# Altium PCB Driver_BLDC.PcbDoc
Units mm, origin at the board's own origin, x right, y up, seen from the top; angles counter-clockwise.
Board outline 100 x 100 mm, 2 copper layers (Top Layer, Bottom Layer), stack 1.569 mm thick; 50 components, 35 nets, 151 pads, 170 vias.
Unrouted connection lines stored in the file: 94.
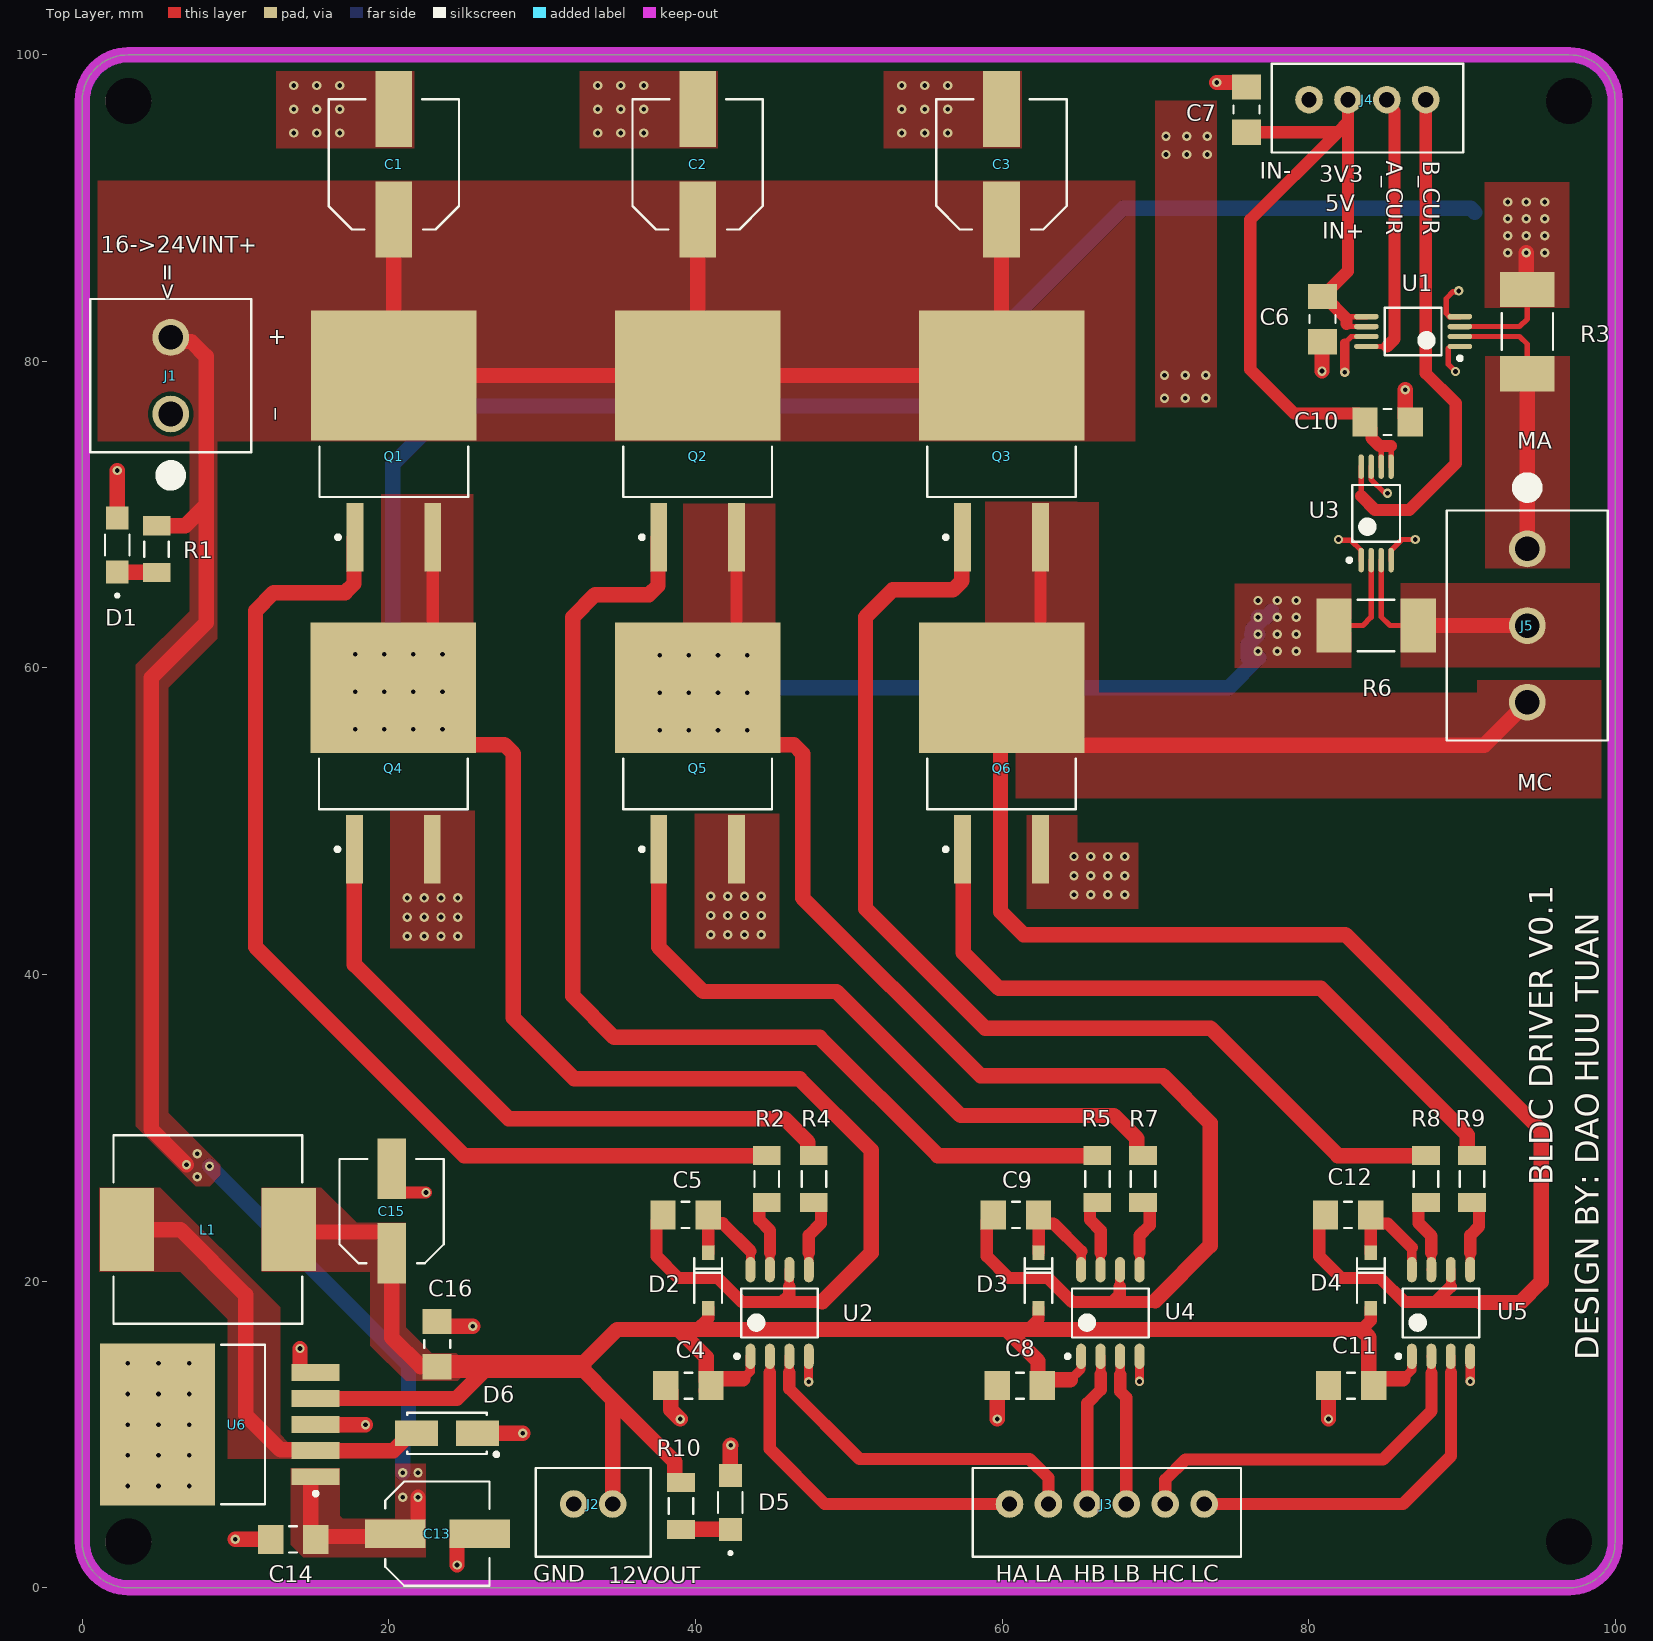
[diagram p0: Top Layer view]
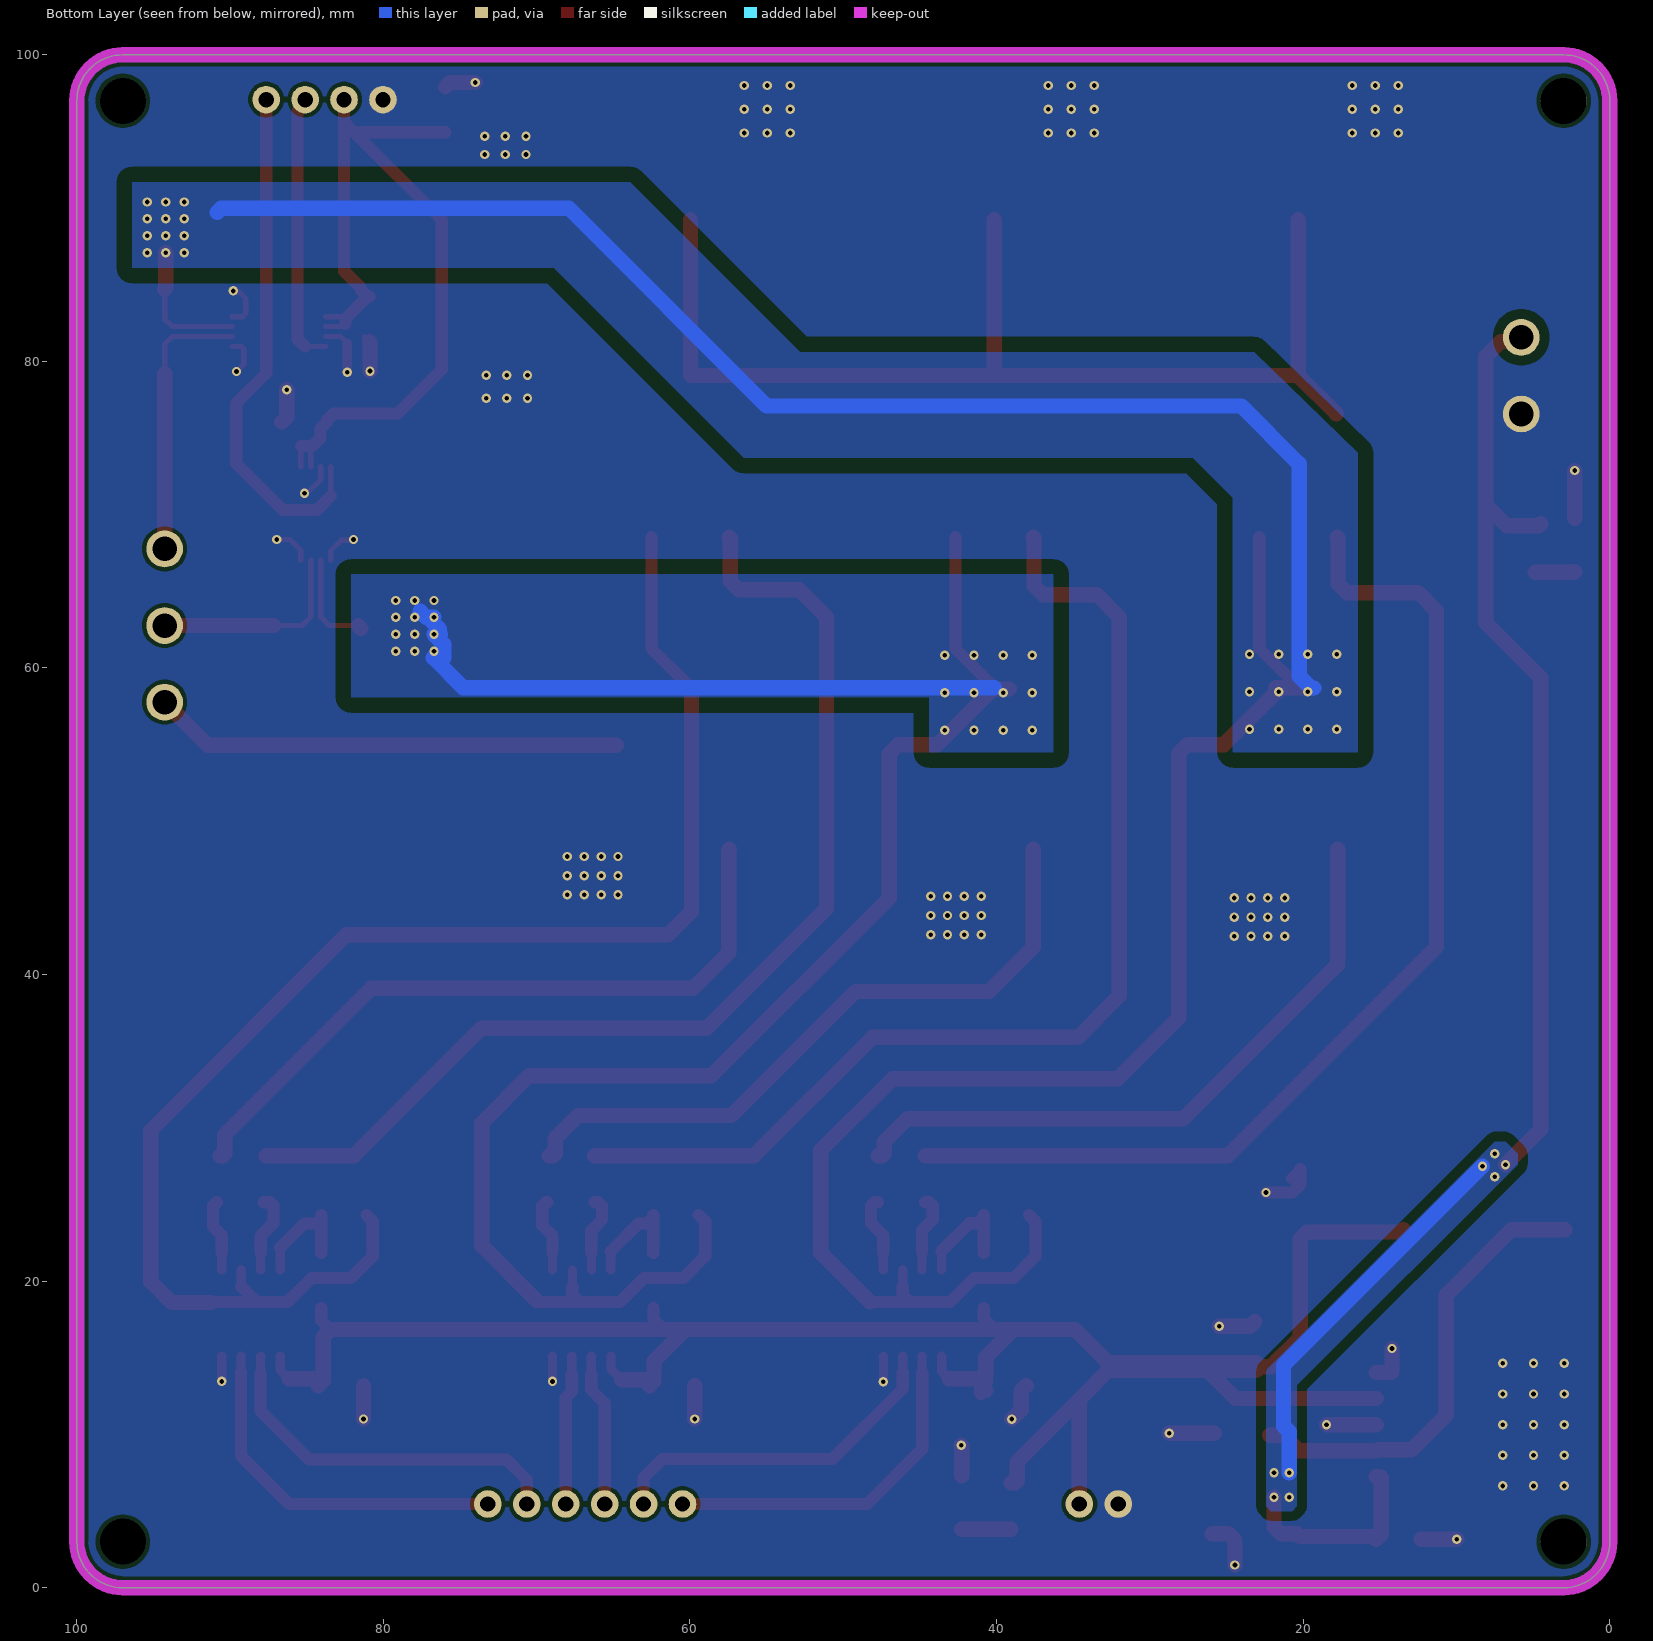
[diagram p1: Bottom Layer view, seen from below]
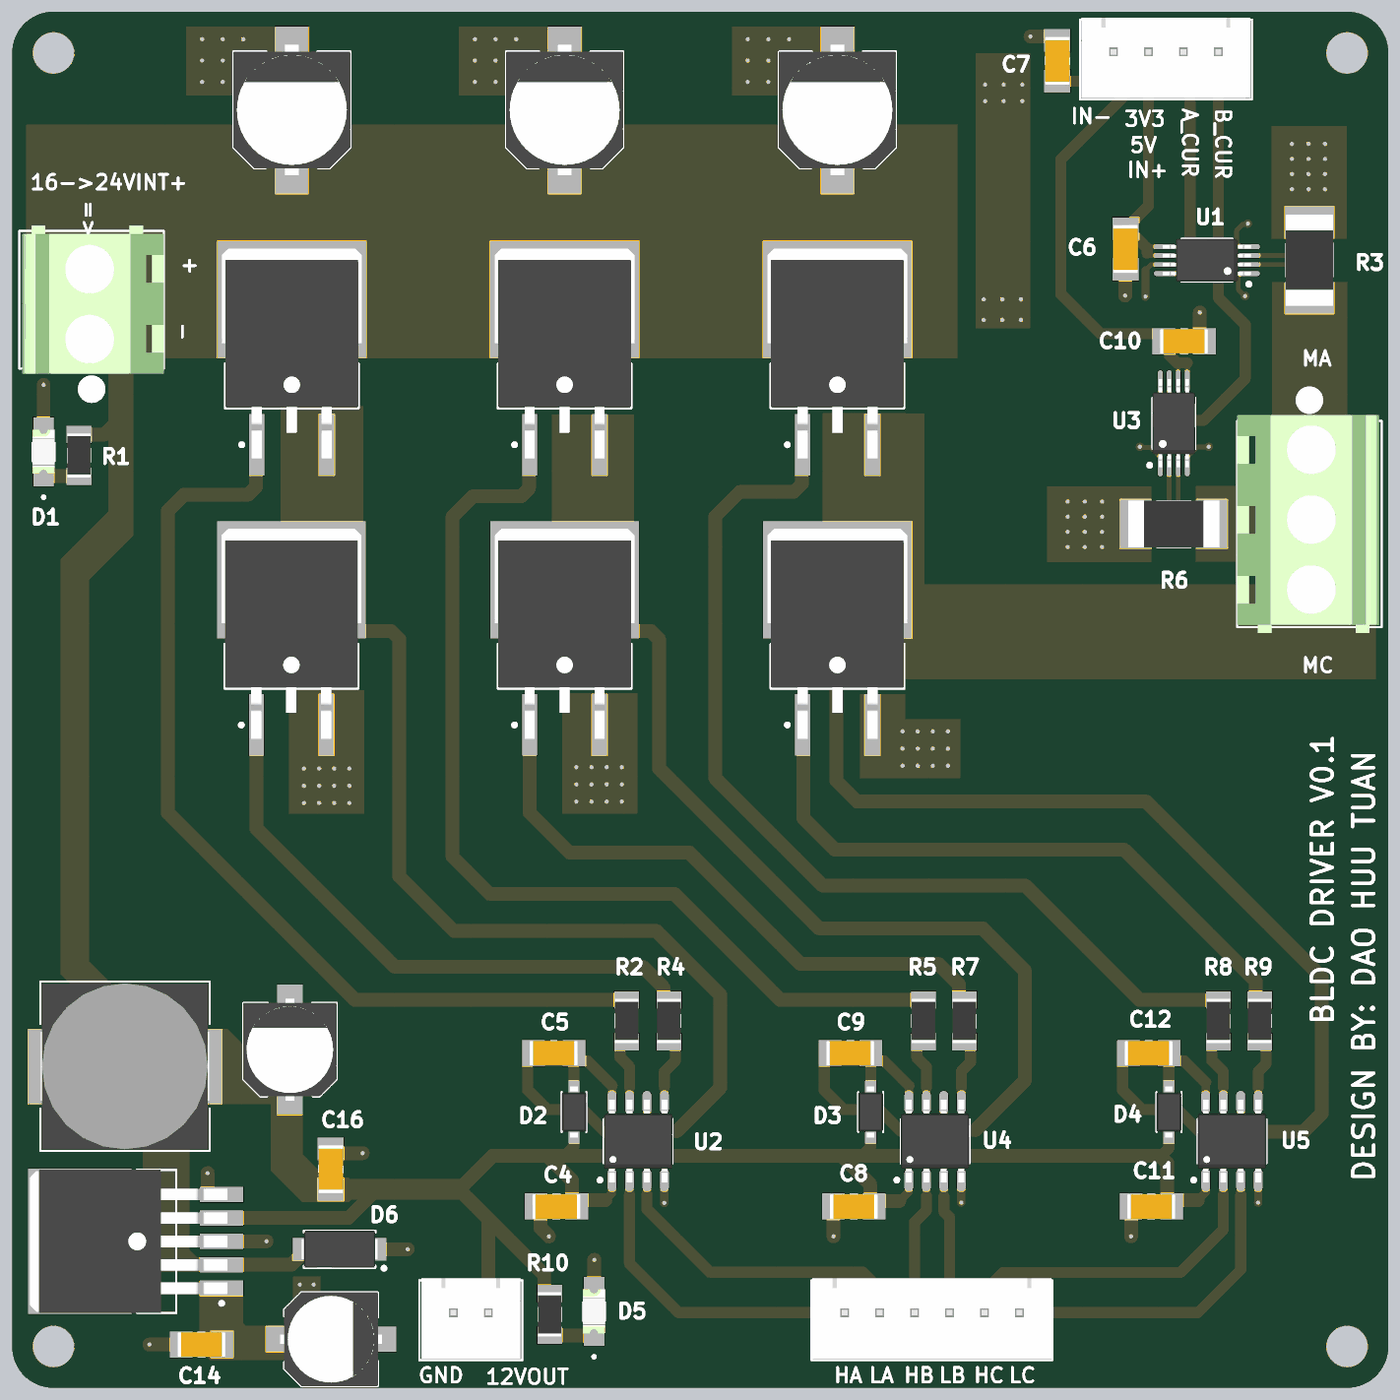
[diagram p2: 3D render of the assembled board from above, using the file's embedded part models]

## Layer stack, top to bottom
Top Solder: solder mask 0.0254, SM-001, Dk 4
Top Layer: signal copper 0.035
Dielectric 1: core 1.4986, Core-043, Dk 4.3
Bottom Layer: signal copper 0.035
Bottom Solder: solder mask 0.0254, SM-001, Dk 4

## Board outline
3,0 cw(c3,3) 0,3 0,97 cw(c3,97) 3,100 97,100 cw(c97,97) 100,97 100,3 cw(c97,3) 97,0

## Design rules (kind name [scope] priority, off if disabled: settings)
Clearance Clearance_3 [OnLayer('Bottom Layer') vs InNet('P_SUPPLY')] p1: gap=0.635 ignorepadtopadclearanceinfootprint=FALSE
Clearance Clearance_2 [OnLayer('Bottom Layer') vs InNet('MB_SENS')] p2: gap=1 ignorepadtopadclearanceinfootprint=FALSE
Clearance Clearance_1 [OnLayer('Bottom Layer') vs InNet('MA_SENS')] p3: gap=1 ignorepadtopadclearanceinfootprint=FALSE
Clearance [All] p4: gap=0.254 ignorepadtopadclearanceinfootprint=FALSE
HoleSize [All] p1: absolutevalues=TRUE maxlimit=3 minlimit=0.025 maxpercent=80.000 minpercent=20.000
MinimumSolderMaskSliver MinimumSolderMaskSliver_SSOT [HasFootprint('TSOP65P640X120-8M')] p1: minsoldermaskwidth=0.178
MinimumSolderMaskSliver [All] p2: minsoldermaskwidth=0.254
PlaneConnect [All] p1: planeconnectstyle=Direct reliefexpansion=0.508 reliefentries=4 reliefconductorwidth=0.254 reliefairgap=0.254
PolygonConnect [All] p1: connectstyle=Direct reliefconductorwidth=0.254 reliefentries=4 polygonreliefangle="90 Angle" airgapwidth=0.254
RoutingVias [All] p1: holewidth=0.305 width=0.61 viastyle="Through Hole" minholewidth=0.305 minwidth=0.61 maxholewidth=0.305 maxwidth=0.61
SolderMaskExpansion SolderMaskExpansion_via [IsVia] p1: expansion=0.102 istentingtop=TRUE
SolderMaskExpansion [All] p2: expansion=0.051 istentingtop=FALSE
SupplyNets "Schematic Supply Nets_3" [InNet('P_SUPPLY')] p1: voltage=0.000
SupplyNets "Schematic Supply Nets_2" [InNet('V_SENS+')] p2: voltage=0.000
SupplyNets "Schematic Supply Nets_1" [InNet('12V+')] p3: voltage=0.000
SupplyNets "Schematic Supply Nets" [InNet('GND')] p4: voltage=0.000
Width [All] p1: maxlimit=20 minlimit=0.254 preferedwidth=0.6 minimp=50.000000 maximp=50.000000 favimp=50.000000
27 further rules are at their usual default settings.

## Components (designator, comment, footprint, x,y, rotation, side; value= is the part's Value field where it differs from the comment)
C1 "220uF" CAPAE9583X105M 20.32,92.86 r90 top locked
C2 "220uF" CAPAE9583X105M 40.145,92.86 r90 top locked
C3 "220uF" CAPAE9583X105M 59.97,92.86 r90 top locked
C4 "1uF" CAPC3216X18M 39.545,13.18 r180 top locked
C5 "1uF" CAPC3216X18M 39.355,24.32 r0 top locked
C6 "100nF" CAPC3216X18M 80.91,82.755 r90 top locked
C7 "10uF" CAPC3216X18M 75.95,96.43 r90 top locked
C8 "1uF" CAPC3216X18M 61.16,13.18 r180 top locked
C9 "1uF" CAPC3216X18M 60.905,24.32 r0 top locked
C10 "100nF" CAPC3216X18M 85.155,76.05 r180 top locked
C11 "1uF" CAPC3216X18M 82.78,13.18 r180 top locked
C12 "1uF" CAPC3216X18M 82.585,24.32 r0 top locked
C13 "100uF" CAPAE7466X77M 23.17,3.53 r0 top locked
C14 "100nF" CAPC3216X18M 13.76,3.15 r180 top locked
C15 "100uF" CAPAE7466X77M 20.18,24.57 r90 top locked
C16 "100nF" CAPC3216X18M 23.15,15.89 r90 top locked
D1 "LED" LEDC3216X120N 2.28,68.02 r90 top locked
D2 "1N4148W" SODFL370X135-2M 40.83,20.04 r90 top locked
D3 "1N4148W" SODFL370X135-2M 62.38,20.04 r90 top locked
D4 "1N4148W" SODFL370X135-2M 84.06,20.04 r90 top locked
D5 "LED" LEDC3216X120N 42.28,5.557 r90 top locked
D6 "1N5824" DIOM5025X22M 23.79,10.07 r180 top locked
J1 "KF128-5.0-2P" KF128-2P 5.77,79.07 r90 top locked
J2 "xh2.54_2p" xh2.54_2p 33.33,5.46 r180 top locked
J3 "xh2.54_6p" xh2.54_6p 66.838,5.46 r180 top locked
J4 "xh2.54_4p" xh2.54_4P 83.84,97.08 r180 top locked
J5 "KF128-3P" KF128-3P 94.27,62.77 r270 top locked
L1 "330uH" INDP120120X80M 8.19,23.36 r180 top locked
Q1 "IRF540S" DPAK254P1524X483-3M 20.32,74.83 r90 top locked
Q2 "IRF540S" DPAK254P1524X483-3M 40.145,74.83 r90 top locked
Q3 "IRF540S" DPAK254P1524X483-3M 59.97,74.83 r90 top locked
Q4 "IRF540S" DPAK254P1524X483-3M 20.29,54.47 r90 top locked
Q5 "IRF540S" DPAK254P1524X483-3M 40.145,54.47 r90 top locked
Q6 "IRF540S" DPAK254P1524X483-3M 59.97,54.47 r90 top locked
R1 "10k" RESC3116X06M 4.85,67.75 r270 top locked
R2 "100R" RESC3116X06M 44.65,26.665 r90 top locked
R3 "5mR" RESC6432X07M 94.27,81.95 r270 top locked
R4 "100R" RESC3116X06M 47.73,26.665 r90 top locked
R5 "100R" RESC3116X06M 66.22,26.665 r90 top locked
R6 "5mR" RESC6432X07M 84.41,62.77 r180 top locked
R7 "100R" RESC3116X06M 69.2,26.665 r90 top locked
R8 "100R" RESC3116X06M 87.66,26.665 r90 top locked
R9 "100R" RESC3116X06M 90.66,26.665 r90 top locked
R10 "10k" RESC3116X06M 39.06,5.332 r270 top locked
U1 "INA240A2PWR" TSOP65P640X120-8M 86.82,81.95 r180 top locked
U2 "IR2103STRPBF" SOIC127P600X175-8M 45.49,17.92 r90 top locked
U3 "INA240A2PWR" TSOP65P640X120-8M 84.41,70.09 r90 top locked
U4 "IR2103STRPBF" SOIC127P600X175-8M 67.065,17.92 r90 top locked
U5 "IR2103STRPBF" SOIC127P600X175-8M 88.64,17.92 r90 top locked
U6 "LM2596S-12" DPAK170P1435X470-6M 8.97,10.64 r180 top locked

## Footprints (in the part's own frame and the unit in brackets; to place one, negate y for a bottom-side part, rotate by r counter-clockwise, add the part's x,y. Pads: shape width x height; smd on the part's side, far side on the other; paste and mask are expansions set on the pad)
CAPAE7466X77M [mm] "Aluminum Electrolytic Capacitor, Body 6.60x6.60x7.70mm, IPC Low Density"
  rect 3.95x1.85 smd: N(2.75,0) P(-2.75,0)
  silkscreen extent -3.4,-3.4 3.4,3.4, body extent -3.7,-3.4 3.7,3.4, height 7.7
CAPAE9583X105M [mm] "Aluminum Electrolytic Capacitor, Body 8.30x8.30x10.50mm, IPC Low Density"
  rect 4.95x2.4 smd: N(3.6,0) P(-3.6,0)
  silkscreen extent -4.25,-4.25 4.25,4.25, body extent -4.75,-4.25 4.75,4.25, height 10.5
CAPC3216X18M [mm] "Chip Capacitor, 2-Leads, Body 3.20x1.60mm, IPC Low Density"
  rect 1.65x1.9 smd: 1(-1.475,0) 2(1.475,0)
  silkscreen extent -0.25,-0.85 0.25,0.85, body extent -1.75,-0.9 1.75,0.9, height 1.8
DIOM5025X22M [mm] "Molded Diode, 2-Leads, Body 4.95x2.50mm, IPC Low Density"
  rect 2.8x1.65 smd: A(-2,0) K(2,0)
  silkscreen extent -3.35,-1.35 2.6,1.5, body extent -2.82,-1.35 2.82,1.35, height 2.2
DPAK170P1435X470-6M [mm] "D2-PAK, 6-Pads, Body 7.55x8.57mm (max), IPC Low Density"
  rect 3.15x1.1 smd: 1(-6.25,3.4) 2(-6.25,1.7) 3(-6.25,0) 4(-6.25,-1.7) 5(-6.25,-3.4)
  rect 7.5x10.55 smd: 3(4.05,0)
  silkscreen extent -6.38,-5.2 -0.1,5.2, body extent -6.67,-5.2 7.68,5.2, height 4.7
DPAK254P1524X483-3M [mm] "D2-PAK, 3-Pads, Body 8.44x8.19mm (max), IPC Low Density"
  rect 8.5x10.8 smd: D(4.25,0)
  rect 4.45x1.1 smd: G(-6.3,2.54) S(-6.3,-2.54)
  silkscreen extent -6.42,-4.85 -0.4,4.85, body extent -7.3,-5.08 7.95,5.08, height 4.83
INDP120120X80M [mm] "Precision Wire Wound Inductor, 2-Leads, Body 12.05x12.05mm, IPC Low Density"
  rect 3.55x5.4 smd: 1(-5.275,0) 2(5.275,0)
  silkscreen extent -6.15,-6.15 6.15,6.15, body extent -6.12,-6.02 6.12,6.02, height 8.1
KF128-2P [mm]
  round 2.4 hole 1.6: 1(-2.5,0) 2(2.5,0)
  silkscreen extent -7,-5.25 5,5.25, body extent -5.38,-5.25 5.38,5.05, height 14.59
KF128-3P [mm]
  round 2.4 hole 1.6: 1(-5,0) 2(0,0) 3(5,0)
  silkscreen extent -9.5,-5.25 7.5,5.25, body extent -7.92,-5.25 7.92,5.05, height 14.59
LEDC3216X120N [mm]
  rect 1.5x1.5 smd: A(-1.75,0) K(1.75,0)
  silkscreen extent -3.4,-0.8 0.68,0.8, body extent -1.6,-0.8 1.6,0.8, height 1.2
RESC3116X06M [mm] "Chip Resistor, 2-Leads, Body 3.10x1.60mm, IPC Low Density"
  rect 1.25x1.8 smd: 1(-1.525,0) 2(1.525,0)
  silkscreen extent -0.5,-0.8 0.5,0.8, body extent -1.6,-0.85 1.6,0.85, height 0.65
RESC6432X07M [mm] "Chip Resistor, 2-Leads, Body 6.37x3.18mm, IPC Low Density"
  rect 2.3x3.55 smd: 1(-2.75,0) 2(2.75,0)
  silkscreen extent -1.2,-1.68 1.2,1.68, body extent -3.32,-1.72 3.32,1.72, height 0.66
SODFL370X135-2M [mm] "SODFL, 2-Leads, Body 1.60x3.70mm, IPC Low Density"
  rect 0.95x0.8 smd: A(-1.8,0) K(1.8,0)
  silkscreen extent -1.45,-0.9 1.45,0.9, body extent -1.85,-0.9 1.85,0.9, height 1.35
SOIC127P600X175-8M [mm] "SOIC, 8-Leads, Body 4.90x3.90mm, Pitch 1.27mm, IPC Low Density"
  oval 1.65x0.65 smd: 1(-2.825,1.905) 2(-2.825,0.635) 3(-2.825,-0.635) 4(-2.825,-1.905) 5(2.825,-1.905) 6(2.825,-0.635) 7(2.825,0.635) 8(2.825,1.905)
  silkscreen extent -2.95,-2.5 1.6,2.9, body extent -3,-2.5 3,2.5, height 1.75
TSOP65P640X120-8M [mm] "TSOP, 8-Leads, Body 3.00x4.40mm, Pitch 0.65mm, IPC Low Density"
  oval 1.6x0.353 smd mask+0.051: 1(-3.05,0.975) 2(-3.05,0.325) 3(-3.05,-0.325) 4(-3.05,-0.975) 5(3.05,-0.975) 6(3.05,-0.325) 7(3.05,0.325) 8(3.05,0.975)
  silkscreen extent -3.18,-1.55 1.85,1.87, body extent -3.2,-1.55 3.2,1.55, height 1.2
xh2.54_2p [mm]
  round 1.8 hole 1 mask+0.05: 1(-1.27,0) 2(1.27,0)
  silkscreen extent -3.75,-2.35 3.75,3.45, body extent -3.61,-2.49 3.61,3.35, height 7.21
xh2.54_4P [mm]
  round 1.8 hole 1 mask+0.05: 1(-3.81,0) 2(-1.27,0) 3(1.27,0) 4(3.81,0)
  silkscreen extent -6.25,-2.35 6.25,3.45, body extent -6.15,-2.49 6.15,3.35, height 7.21
xh2.54_6p [mm]
  round 1.8 hole 1 mask+0.05: 1(-6.35,0) 2(-3.81,0) 3(-1.27,0) 4(1.27,0) 5(3.81,0) 6(6.35,0)
  silkscreen extent -8.75,-2.35 8.75,3.45, body extent -8.69,-2.49 8.69,3.35, height 7.21

## Part data
C1 C2 C3: library part VT1V221M-CRF10, "220uF 35V ±20% SMD,D8xL10.5mm Aluminum Electrolytic Capacitors - SMD ROHS", LCSC Part=C305376
C4 C5 C8 C9 C11 C12: library part CC1206JKX7R9BB105, "50V 1uF X7R ±5% 1206 Multilayer Ceramic Capacitors MLCC - SMD/SMT ROHS", LCSC Part=C527273
C6 C10 C14 C16: library part CC1206JRX7R9BB104, "50V 100nF X7R ±5% 1206 Multilayer Ceramic Capacitors MLCC - SMD/SMT ROHS", LCSC Part=C541547
C7: library part CC1206KKX7R8BB106, "25V 10uF X7R ±10% 1206 Multilayer Ceramic Capacitors MLCC - SMD/SMT ROHS", LCSC Part=C70462
C13 C15: library part VT1V101M-CRE77, "100uF 35V ±20% SMD,D6.3xL7.7mm Aluminum Electrolytic Capacitors - SMD ROHS", LCSC Part=C294520
D1 D5: library part LED_1206, "SMD LED 1206", Available=no
D2 D3 D4: "75V Independent Type 1.25V@150mA 8ns 150mA SOD-123 Switching Diodes ROHS", C908248=C908248
D6: library part SS54, "40V Independent Type 550mV@5A 5A SMA(DO-214AC) Schottky Diodes ROHS", LCSC Part=C727065
J1: "1x2P 24A -40℃~+105℃ 250V Green 12~22 Straight 5mm 2.5 1 2 Plugin,P=5mm Screw Terminal Blocks ROHS", LCSC Part=C474950
J5: library part KF128-5.0-3P, "1x3P 24A -40℃~+105℃ 250V Green 12~22 Straight 5mm 2.5 1 3 Plugin,P=5mm Screw Terminal Blocks ROHS", LCSC Part=C474951
L1: library part CDRH127/LDNP-331MC, "1.2A 330uH ±20% SMD-4P,12x12mm Power Inductors ROHS", LCSC Part=C2453076
Q1 Q2 Q3 Q4 Q5 Q6: "Power Field-Effect Transistor, 28A I(D), 100V, 0.077ohm, 1-Element, N-Channel, Silicon, Metal-oxide Semiconductor FET, TO-263AB", Avalanche Energy Rating (Eas)=230mJ, Case Connection=DRAIN, Drain Current-Max (Abs) (ID)=28A, Drain-source On Resistance-Max=77mR, DS Breakdown Voltage-Min=100V, LCSC Part=C3025611, Manufacturer="Vishay Siliconix", Max Operating Temperature=175°C, Operating Mode="ENHANCEMENT MODE", Package Body Material=Plastic, Package Shape=Rectangular, Package Style="SMALL OUTLINEMeter", Power Dissipation-Max (Abs)=150W, Pulsed Drain Current-Max (IDM)=110A, Category=Transistors, ComponentLink1Description=https://datasheet.ciiva.com:443/pdfs/VipMasterIC/IC/SILX/SILXS13402/SILXS13402-1.pdf?src-supplier=IHS+Markit, ComponentLink1URL=https://datasheet.ciiva.com:443/pdfs/VipMasterIC/IC/SILX/SILXS13402/SILXS13402-1.pdf?src-supplier=IHS+Markit, ComponentLink2Description=https://datasheet.ciiva.com/13048/sihf540s-60587-13048065.pdf?src-supplier=Mouser, ComponentLink2URL=https://datasheet.ciiva.com/13048/sihf540s-60587-13048065.pdf?src-supplier=Mouser, ComponentLink3Description=https://datasheet.ciiva.com/952/sihf540s-952269.pdf?src-supplier=Digikey, ComponentLink3URL=https://datasheet.ciiva.com/952/sihf540s-952269.pdf?src-supplier=Digikey, Drain Current-Max (ID)=28A, FET Technology="METAL-OXIDE SEMICONDUCTOR", JEDEC-95 Code=TO-263AB, JESD-30 Code=R-PSSO-G2, JESD-609 Code=e0, Manufacturer Part Number=IRF540S, Moisture Sensitivity Level=1, Number of Elements=1, Pins=2, Polarity/Channel Type=N-CHANNEL, Qualification Status="Not Qualified", RoHS=No, RoHS Compliant=No, Supplier=Avnet, Supplier Part Number=IRF540S, Surface Mount=Yes, Terminal Finish=Tin, Terminal Form="Gull Wing", Terminal Position=SINGLE, Transistor Application=SWITCHING, Transistor Element Material=SILICON
R1 R10: library part RC1206FR-0710KL, "250mW Thick Film Resistors 200V ±100ppm/℃ ±1% 10kΩ 1206 Chip Resistor - Surface Mount ROHS", LCSC Part=C132649
R2 R4 R5 R7 R8 R9: library part RC1206FR-07100RL, "250mW Thick Film Resistors 200V ±100ppm/℃ ±1% 100Ω 1206 Chip Resistor - Surface Mount ROHS", LCSC Part=C137392
R3 R6: library part WSL2512L5000FEA18, "2W 0.5mΩ Patch Current Sensing Resistors ±400ppm/℃ ±1% 2512 Current Sense Resistors / Shunt Resistors ROHS", LCSC Part=C1518119
U1 U3: "-4V~80V 400kHz Single channel TSSOP-8 Current Sense Amplifiers ROHS", LCSC Part=C129949
U2 U4 U5: "Half Bridge 2 130mA 100ns 50ns 10V~20V 270mA SOIC-8 Gate Drivers ROHS", LCSC Part=C2957
U6: "Step-down type Fixed 12V 4.5V~40V 3A TO-263-5L DC-DC Converters ROHS", LCSC Part=C19631824

## Free pads (board coordinates)
  oval 3x1.6 hole 3: 5(3,97) 6(97,97) 7(97,3) 8(3,3)

## Via types
v1: diameter 0.61, hole 0.305, Top Layer to Bottom Layer, tented both sides, 170 vias

## Nets (pads, with @x,y where several pads share a name; then routed paths per layer and width w, separated by ;. In a path a pad name is that pad's centre, name@x,y a point inside that pad or via, vN(x,y) a via of type N, cw(c..) or ccw(c..) an arc to the next point about the centre after c; other vN are vias at no path point)
12V+: C4.1 C8.1 C11.1 C15.P C16.1 D2.A D3.A D4.A J2.1 L1.1 R10.1 U2.1 U4.1 U5.1 U6.4 | length 138.6
  Top Layer w0.6: D2.A@40.77,18.18 D2.A ; 43.1,13.63 43.575,14.105 43.575,15.085 U2.1 ; 64.46,13.57 65.15,14.26 65.15,15.085 U4.1 ; 86.16,13.63 86.725,14.195 86.725,15.085 U5.1
  Top Layer w0.8: 40.1,16.85 40.83,17.58 D2.A ; 61.72,16.85 62.38,17.51 D3.A ; 83.48,16.85 84.06,17.43 D4.A
  Top Layer w1: L1.1 13.615,23.21 19.755,23.21 20.18,22.785 20.18,16.32 22.085,14.415 C16.1 ; U6.4 24.425,12.34 26.5,14.415 ; J2.1 34.6,12.27 ; R10.1 38.785,6.857 38.66,6.981 38.66,8.21 34.6,12.27 ; C4.1@41.02,12.73 40.89,12.86 40.7,12.86 C4.1 40.695,13.505 40.695,15.045 38.98,16.76 38.98,16.85 ; C4.1@41.02,13.305 41.345,13.63 43.1,13.63 ; 64.46,13.57 62.96,13.57 62.635,13.245 C8.1 62.344,13.471 62.344,14.786 60.28,16.85 ; 83.48,16.85 83.42,16.85 ; 86.16,13.63 84.58,13.63 84.255,13.305 C11.1 83.93,13.505 83.93,16.34 83.42,16.85 ; 34.6,12.27 32.455,14.415 34.89,16.85 38.98,16.85 ; 38.98,16.85 40.1,16.85 60.28,16.85 ; 60.28,16.85 61.72,16.85 83.42,16.85
  Top Layer w1.5: C16.1 26.5,14.415 32.455,14.415
CUR_A: J4.2 U1.8 | length 17.9
  Top Layer w0.35: U1.8 85.11,80.975
  Top Layer w0.8: 85.11,80.975 85.6,81.465 85.6,96.319 85.11,96.809 J4.2
CUR_B: J4.1 U3.8 | length 34.3
  Top Layer w0.35: 83.435,71.215 U3.8
  Top Layer w0.8: 83.435,71.215 84.34,70.31 86.57,70.31 89.6,73.34 89.6,77.28 87.65,79.23 J4.1
Gate_HA: Q1.G R2.2 | length 71.1
  Top Layer w1: Q1.G 17.73,68.48 17.73,65.496 17.144,64.91 12.48,64.91 11.3,63.73 11.3,41.8 24.91,28.19 R2.2
Gate_HB: Q2.G R5.2 | length 72.8
  Top Layer w1: Q2.G 37.555,68.48 37.555,65.366 36.969,64.78 33.46,64.78 32,63.32 32,38.6 34.7,35.9 48.1,35.9 55.81,28.19 R5.2
Gate_HC: Q3.G R8.2 | length 72.4
  Top Layer w1: Q3.G 57.38,68.48 57.38,65.686 56.794,65.1 52.87,65.1 51.1,63.33 51.1,44.3 58.9,36.5 73.6,36.5 81.91,28.19 R8.2
Gate_LA: Q4.G R4.2 | length 43.1
  Top Layer w1: Q4.G 17.75,40.65 27.8,30.6 45.8,30.6 47.33,29.07 47.33,28.315 47.455,28.19 R4.2
Gate_LB: Q5.G R7.2 | length 44.2
  Top Layer w1: Q5.G 37.605,41.795 40.5,38.9 49.2,38.9 57.3,30.8 67.3,30.8 68.8,29.3 68.8,28.315 68.925,28.19 R7.2
Gate_LC: Q6.G R9.2 | length 46.1
  Top Layer w1: Q6.G 57.48,48.12 57.48,41.42 59.8,39.1 80.8,39.1 90.362,29.538 90.362,28.315 90.487,28.19 R9.2
GND: C1.N C2.N C3.N C4.2 C6.1 C7.2 C8.2 C10.1 C11.2 C13.N C14.2 C15.N C16.2 D1.K D5.K D6.A J1.1 J2.2 J4.4 Q4.S Q5.S Q6.S U1.1 U1.4 U1.7 U2.4 U3.1 U3.4 U3.7 U4.4 U5.4 U6.3 U6.5 | length 60.9
  Top Layer w0.35: C6.1 C6.1@81.255,81.625 ; v1(81.95,68.38) 82,68.33 82.768,68.33 83.435,67.664 U3.1 ; 82.36,81.195 82.79,81.625 U1.7 ; U3.7@84.086,73.139 84.086,72.31 84.936,71.46 85.1,71.46 v1(85.15,71.41) ; U3.4 85.385,67.664 86.101,68.38 v1(86.95,68.38) ; v1(89.59,79.34) 89.102,79.828 89.102,80.83 89.247,80.975 U1.1 ; v1(89.8,84.6) 89.75,84.55 89.435,84.55 88.98,84.095 88.98,83.132 89.186,82.926 U1.4
  Top Layer w0.6: v1(47.385,13.438) 47.385,15.075 U2.4@47.4,15.09 ; v1(68.97,13.458) U4.4 ; v1(82.36,79.3) 82.36,81.195 ; v1(90.545,13.458) U5.4
  Top Layer w0.8: C15.N@20.705,26.7 20.18,27.225 C15.N 20.18,26.305 20.705,25.78 v1(22.42,25.78)
  Top Layer w1: D1.K v1(2.28,72.88) ; v1(9.97,3.15) C14.2 ; v1(14.2,15.6) 14.2,14.09 14.25,14.04 U6.5 ; U6.3@15.22,10.64 v1(18.48,10.64) ; C16.2 23.465,17.05 v1(25.47,17.05) ; v1(24.45,1.48) 24.45,3.105 24.875,3.53 C13.N ; D6.A v1(28.74,10.07) ; C4.2 38.395,12.855 38.395,11.605 v1(39,11) ; D5.K 42.28,9.28 v1(42.3,9.3) ; v1(59.685,11.01) C8.2 ; v1(74,98.2) 75.655,98.2 C7.2 ; v1(80.88,79.37) 80.88,81.25 C6.1 ; v1(81.305,11.01) C11.2 ; v1(86.305,78.145) 86.305,76.375 C10.1
  other v1: 2.97,6.64 4.97,6.64 6.97,6.64 2.97,8.64 4.97,8.64 6.97,8.64 2.97,10.64 4.97,10.64 6.97,10.64 2.97,12.64 4.97,12.64 6.97,12.64 2.97,14.64 4.97,14.64 6.97,14.64 21.2,42.5 22.3,42.5 23.4,42.5 24.5,42.5 41,42.6 42.1,42.6 43.2,42.6 44.3,42.6 21.2,43.75 22.3,43.75 23.4,43.75 24.5,43.75 41,43.85 42.1,43.85 43.2,43.85 44.3,43.85 21.2,45 22.3,45 23.4,45 24.5,45 41,45.1 42.1,45.1 43.2,45.1 44.3,45.1 64.7,45.2 65.8,45.2 66.9,45.2 68,45.2 64.7,46.45 65.8,46.45 66.9,46.45 68,46.45 64.7,47.7 65.8,47.7 66.9,47.7 68,47.7 70.6,77.6 71.95,77.6 73.3,77.6 70.6,79.1 71.95,79.1 73.3,79.1 70.7,93.5 72.05,93.5 73.4,93.5 70.7,94.7 72.05,94.7 73.4,94.7 13.8,94.9 15.3,94.9 16.8,94.9 33.625,94.9 35.125,94.9 36.625,94.9 53.45,94.9 54.95,94.9 56.45,94.9 13.8,96.45 15.3,96.45 16.8,96.45 33.625,96.45 35.125,96.45 36.625,96.45 53.45,96.45 54.95,96.45 56.45,96.45 13.8,98 15.3,98 16.8,98 33.625,98 35.125,98 36.625,98 53.45,98 54.95,98 56.45,98
HA_INT: J3.6 U2.2 | length 23.2
  Top Layer w0.6: 44.855,14.04 U2.2
  Top Layer w0.8: 44.855,14.04 44.855,9.045 48.44,5.46 J3.6
HB_INT: J3.4 U4.2 | length 10
  Top Layer w0.6: U4.2 66.44,15.085 66.44,13.93
  Top Layer w0.8: J3.4 65.568,12.038 66.44,12.91 66.44,13.93
HC_INT: J3.2 U5.2 | length 24.4
  Top Layer w0.6: U5.2 88.015,15.085 88.015,14.01
  Top Layer w0.8: J3.2 70.648,7.048 71.97,8.37 84.86,8.37 88.015,11.525 88.015,14.01
LA_INT: J3.5 U2.3 | length 23.2
  Top Layer w0.6: U2.3@46.115,15.085 U2.3 46.125,14.04
  Top Layer w0.8: 46.125,14.04 46.125,12.975 50.7,8.4 61.8,8.4 63.028,7.172 J3.5
LB_INT: J3.3 U4.3 | length 9.8
  Top Layer w0.6: U4.3 67.71,15.085 67.71,13.89
  Top Layer w0.8: 67.71,13.89 67.71,12.8 68.108,12.401 J3.3
LC_INT: J3.1 U5.3 | length 23.9
  Top Layer w0.6: U5.3 89.285,15.085 89.285,14.035
  Top Layer w0.8: J3.1 86.16,5.46 89.285,8.585 89.285,14.035
MA_OUT: J5.1 R3.2 U1.2 | length 18
  Top Layer w0.35: U1.2 93.765,81.625 94.27,81.12 R3.2
  Top Layer w1: J5.1 R3.2
MA_SENS: C5.1 Q1.S Q4.D R3.1 U1.3 U2.6 | length 197.3
  Top Layer w0.35: U1.3 93.765,82.275 94.27,82.78 R3.1
  Top Layer w0.6: 46.125,19.645 U2.6
  Top Layer w0.8: Q4.D 22.86,61.29 Q1.S ; C5.1 37.46,23.9 37.46,21.63 38.88,20.21 41.45,20.21 43.02,18.64 45.656,18.64 ; 46.125,19.645 46.125,19.109 45.656,18.64 ; 48.27,18.64 45.656,18.64
  Top Layer w1: Q4.D@19.3,58.7 20.27,58.7 Q4.D ; Q4.D@21.8,58.7 21.78,58.72 Q4.D ; 48.27,18.64 51.46,21.83 51.46,28.54 46.8,33.2 32.1,33.2 28.122,37.178 28.122,54.414 27.537,55 25.16,55 21.44,58.72 Q4.D ; v1(94.2,87.1) 94.2,84.77 R3.1
  Bottom Layer w1: 19.3,58.7 19.5,58.7 20.263,59.463 20.263,73.323 24.03,77.09 55,77.09 67.91,90 90.57,90 90.85,89.72
  other v1: 17.8,56 19.7,56 21.6,56 23.5,56 17.8,58.45 19.7,58.45 21.6,58.45 23.5,58.45 17.8,60.9 19.7,60.9 21.6,60.9 23.5,60.9 93,87.1 95.4,87.1 93,88.2 94.2,88.2 95.4,88.2 93,89.3 94.2,89.3 95.4,89.3 93,90.4 94.2,90.4 95.4,90.4
MB_OUT: J5.2 R6.1 U3.3 | length 13.5
  Top Layer w0.35: U3.3 84.735,63.345 85.31,62.77 R6.1
  Top Layer w1: R6.1 J5.2
MB_SENS: C9.1 Q2.S Q5.D R6.2 U3.2 U4.6 | length 143.9
  Top Layer w0.35: R6.2 R6.2@81.82,62.61 ; R6.2@81.82,62.77 83.54,62.77 84.085,63.315 U3.2
  Top Layer w0.6: 67.675,19.645 U4.6@67.675,20.72
  Top Layer w0.8: Q5.D 42.685,61.26 Q2.S ; C9.1 59.01,23.9 59.01,21.63 60.43,20.21 63,20.21 64.57,18.64 67.206,18.64 ; 67.675,19.645 67.675,19.109 67.206,18.64 ; 70,18.73 69.91,18.64 67.206,18.64
  Top Layer w1: Q5.D@39.17,58.63 40.14,58.63 Q5.D@40.16,58.65 ; Q5.D 43.865,55 46.414,55 47,54.414 47,45 58.6,33.4 70.5,33.4 73.58,30.32 73.58,22.31 70,18.73 ; Q5.D@41.31,58.65 Q5.D@40.16,58.65 ; Q5.D@41.67,58.63 41.65,58.65 Q5.D@40.16,58.65 ; R6.2@81.47,62.58 R6.2
  Bottom Layer w1: 40.145,58.72 74.8,58.72 76.75,60.67 ; 76.05,60.67 76.05,61.547 v1@76.703,62.2 ; 76.303,62.2 v1(76.7,62.2) ; 76.351,62.549 v1@76.901,63.099 ; v1(76.7,63.3) 77.2,63.3 77.6,63.7
  other v1: 37.67,55.93 39.57,55.93 41.47,55.93 43.37,55.93 37.67,58.38 39.57,58.38 41.47,58.38 43.37,58.38 37.67,60.83 39.57,60.83 41.47,60.83 43.37,60.83 76.7,61.1 77.95,61.1 79.2,61.1 77.95,62.2 79.2,62.2 77.95,63.3 79.2,63.3 76.7,64.4 77.95,64.4 79.2,64.4
MC_OUT: C12.1 J5.3 Q3.S Q6.D U5.6 | length 128.8
  Top Layer w0.6: 89.27,19.64 U5.6@89.27,20.74
  Top Layer w0.8: Q6.D 62.51,61.26 Q3.S ; C12.1 80.69,23.9 80.69,21.63 82.11,20.21 84.68,20.21 86.25,18.64 88.27,18.64 ; 89.27,19.64 88.27,18.64 ; 91.26,18.61 91.23,18.64 88.27,18.64
  Top Layer w1: Q6.D 59.9,58.65 59.9,44.1 61.4,42.6 82.4,42.6 95.18,29.82 95.18,19.97 93.82,18.61 91.26,18.61 ; Q6.D@64.8,54.97 Q6.D@64.84,54.97 ; Q6.D@64.94,54.97 91.47,54.97 J5.3
NetC5_2: C5.2 D2.K U2.8 | length 7.4
  Top Layer w0.6: U2.8 43.595,20.755 43.595,21.955
  Top Layer w0.8: D2.K C5.2@40.83,24.195 ; C5.2 C5.2@40.83,24.195 ; 43.595,21.955 41.78,23.77 41.255,23.77 C5.2@40.83,24.195
NetC9_2: C9.2 D3.K U4.8 | length 7.4
  Top Layer w0.6: U4.8@65.155,20.74 65.165,20.75 65.165,21.951
  Top Layer w0.8: D3.K@62.4,21.835 C9.2@62.4,24.19 ; C9.2@62.4,24.315 C9.2@62.4,24.19 ; 65.165,21.951 63.35,23.765 62.825,23.765 C9.2@62.4,24.19
NetC12_2: C12.2 D4.K U5.8 | length 6.9
  Top Layer w0.6: U5.8 86.735,22.195
  Top Layer w0.8: D4.K 84.06,23.765 C12.2 ; C12.2@84.4,23.765 85.165,23.765 86.735,22.195
NetD1_A: D1.A R1.2 | length 2.6
  Top Layer w1: D1.A 2.303,66.248 4.828,66.248 R1.2
NetD5_A: D5.A R10.2 | length 3.2
  Top Layer w1: R10.2 D5.A
NetD6_K: D6.K L1.2 U6.2 | length 30.4
  Top Layer w1: L1.2 6.41,23.36 10.66,19.11 10.66,11.27 12.94,8.99 15.17,8.99 U6.2 20.304,8.94 20.89,9.526 20.89,9.745 21.095,9.95 D6.K@22.18,9.95
NetR2_1: R2.1 U2.7 | length 5
  Top Layer w0.6: U2.7 44.86,20.75 44.86,21.85
  Top Layer w0.8: R2.1 44.396,25.14 44.171,24.915 44.171,23.999 44.86,23.31 44.86,21.85
NetR4_1: R4.1 U2.5 | length 5.1
  Top Layer w0.6: U2.5 47.395,21.845
  Top Layer w0.8: 47.395,21.845 47.395,22.985 48.194,23.784 48.194,24.915 47.969,25.14 R4.1
NetR5_1: R5.1 U4.7 | length 5
  Top Layer w0.6: U4.7 66.435,20.75 66.435,21.85
  Top Layer w0.8: R5.1@66.225,25.14 65.971,25.14 65.746,24.915 65.746,23.999 66.435,23.31 66.435,21.85
NetR7_1: R7.1 U4.5 | length 4.9
  Top Layer w0.6: U4.5 68.97,21.845
  Top Layer w0.8: 68.97,21.845 68.97,22.98 69.64,23.65 69.64,24.915 69.415,25.14 R7.1@69.305,25.14
NetR8_1: R8.1 U5.7 | length 5.2
  Top Layer w0.6: U5.7 88.01,20.75 88.01,21.85
  Top Layer w0.8: R8.1@87.8,25.14 87.401,25.14 87.176,24.915 87.176,23.784 88.01,22.95 88.01,21.85
NetR9_1: R9.1 U5.5 | length 4.7
  Top Layer w0.6: U5.5 90.545,21.845
  Top Layer w0.8: 90.545,21.845 90.545,22.985 91.119,23.559 91.119,24.915 90.894,25.14 R9.1@90.88,25.14
P_SUPPLY: C1.P C2.P C3.P C13.P C14.1 J1.2 Q1.D Q2.D Q3.D R1.1 U6.1 | length 174.9
  Top Layer w1: R1.1@4.5,69.4 4.625,69.275 R1.1 6.715,69.275 8.08,70.64 ; J1.2@5.736,81.536 J1.2 6.038,81.302 7.108,81.302 8.08,80.33 8.08,70.64 ; v1(6.8,27.6) 4.5,29.9 4.5,59.37 8.08,62.95 8.08,70.64 ; U6.1 14.96,7.24 14.91,7.19 14.91,4.99 14.91,3.475 C14.1 15.425,3.34 20.23,3.34 C13.P 21.47,3.53 21.895,3.955 21.895,4.343 21.9,4.348 v1(21.9,5.9) ; Q1.D@17.83,76.59 Q1.D ; C1.P Q1.D ; C2.P Q2.D ; C3.P Q3.D Q2.D ; Q1.D Q2.D
  Bottom Layer w1: v1(8.3,27.5) 21.28,14.52 21.28,10.55 20.9,10.17 v1(20.9,7.5)
  other v1: 20.9,5.9 21.9,7.5 7.5,26.8 7.5,28.3
V_SENS+: C6.2 C7.1 C10.2 J4.3 U1.5 U1.6 U3.5 U3.6 | length 57.9
  Top Layer w0.3: 82.48,82.785 82.619,82.924 ; U3.6 U3.6@84.737,73.142
  Top Layer w0.35: 82.48,82.46 82.664,82.276 U1.6 ; 82.619,82.924 U1.5@83.769,82.924 ; 84.634,74.48 84.735,74.379 U3.6@84.735,73.679 ; U3.6@84.734,73.681 U3.6@84.735,73.679 ; U3.6 U3.6@84.735,73.679 ; U3.5 85.385,74.48
  Top Layer w0.8: C7.1 81.91,94.955 ; C6.2 C6.2@81.035,84.23 ; 82.48,82.46 82.48,82.785 C6.2@81.035,84.23 ; J4.3 82.57,95.615 ; 85.385,74.48 84.634,74.48 84.105,75.009 84.105,75.625 C10.2 83.68,76.175 83.255,76.6 82.786,76.6 79.07,76.6 76.2,79.47 76.2,89.245 81.91,94.955 ; C6.2@81.035,84.23 81.46,84.655 81.46,84.78 82.57,85.89 82.57,95.615 ; 81.91,94.955 82.57,95.615

## Polygon pours and split planes (outlines as drawn)
GND on Top Layer "NONET_L-01_P-001" (solid, pour order 33): 70,97 70,77 74,77 74,97
P_SUPPLY on Top Layer "P_SUPPLY_L01_P028" (solid, remove dead copper, pour order 28): 22.4,2.6 22.4,2 14.4,2 13.6,2.8 13.6,7.8 16.8,7.8 16.8,4.7 17,4.5 20.6,4.5
P_SUPPLY on Top Layer "P_SUPPLY_L01_P026" (solid, remove dead copper, pour order 26): 20.4,2.6 20.4,8.1 22.4,8.1 22.4,2.6
P_SUPPLY on Top Layer "P_SUPPLY_L01_P025" (solid, pour order 25): 8.8,75 8.8,61.9 5.6,58.7 5.6,31 9,27.6 9,26.9 8.3,26.2 7.4,26.2 3.5,30.1 3.5,60.2 7,63.7 7,75
12V+ on Top Layer "12V+_L01_P024" (solid, remove dead copper, pour order 24): 11.7,20.6 11.7,26.1 15.6,26.1 17.9,23.8 21.1,23.8 21.1,17 22.8,15.3 24.4,15.3 25,14.7 25,14 24.5,13.5 21.1,13.5 18.8,15.8 18.8,20.6
NetD6_K on Top Layer "NETD6_K_L01_P023" (solid, remove dead copper, pour order 23): 9.5,17.5 6.4,20.6 1.1,20.6 1.1,26.1 5.1,26.1 12.9,18.3 12.9,10 13.4,9.5 16.8,9.5 16.8,8.4 9.3,8.4 16.8,8.4 9.5,8.4
MC_OUT on Top Layer "MC_OUT_L01_P019" (solid, remove dead copper, pour order 19): 60.9,58.4 60.9,51.5 66.4,51.5 99.1,51.5 99.1,59.2 91,59.2 91,57 91,59 91,58.4
MA_OUT on Top Layer "MA_OUT_L01_P022" (solid, remove dead copper, pour order 22): 97.04,66.5 97.04,80.34 91.54,80.34 91.54,66.5
MB_OUT on Top Layer "MB_OUT_L01_P021" (solid, remove dead copper, pour order 21): 99,65.54 86.02,65.54 86.02,60.04 99,60.04
MC_OUT on Top Layer "MC_OUT_L01_P020" (solid, pour order 20): 64.9,70.83 64.93,70.8 66.3,70.8 66.3,56.2 64.9,56.2
MC_OUT on Top Layer "MC_OUT_L01_P018" (solid, remove dead copper, pour order 18): 64.9,61.84 64.9,70.83 58.9,70.83 58.9,61.84
MB_SENS on Top Layer "MB_SENS_L01_P017" (solid, remove dead copper, pour order 17): 45.2,61.74 45.2,70.73 39.2,70.73 39.2,61.74
MA_SENS on Top Layer "MA_SENS_L01_P016" (solid, remove dead copper, pour order 16): 25.5,62.34 25.5,71.33 19.5,71.33 19.5,62.34
GND on Top Layer "GND_L01_P015" (solid, pour order 15): 68.9,44.3 61.6,44.3 61.6,50.4 64.9,50.4 64.9,48.6 68.9,48.6
GND on Top Layer "GND_L01_P013" (solid, pour order 13): 45.455,41.71 45.455,50.5 39.955,50.5 39.955,41.71
GND on Top Layer "GND_L01_P012" (solid, pour order 12): 25.6,41.71 25.6,50.7 20.1,50.7 20.1,41.71
MA_SENS on Top Layer "MA_SENS_L01_P011" (solid, pour order 11): 91.5,91.7 91.5,83.5 97,83.5 97,91.7
MB_SENS on Top Layer "MB_SENS_L01_P010" (solid, pour order 10): 75.2,60 82.8,60 82.8,65.5 75.2,65.5
GND on Top Layer "GND_L01_P004" (solid, remove dead copper, pour order 4): 61.29,98.92 52.29,98.92 52.29,93.92 61.29,93.92
GND on Top Layer "GND_L01_P003" (solid, remove dead copper, pour order 3): 41.465,98.92 32.465,98.92 32.465,93.92 41.465,93.92
GND on Top Layer "GND_L01_P002" (solid, remove dead copper, pour order 2): 21.64,98.92 12.64,98.92 12.64,93.92 21.64,93.92
P_SUPPLY on Top Layer "Top Layer-P_SUPPLY" (solid, remove dead copper, pour order 0): 1,74.8 1,91.8 68.7,91.8 68.7,74.8
GND on Bottom Layer "GND_L02_P031" (solid, remove dead copper, pour order 31): 0,0 0,100 100,100 100,0
P_SUPPLY on Bottom Layer "P_SUPPLY_L02_P027" (solid, pour order 27): 6,27.6 6,28.3 6.8,29.1 7.5,29.1 22.4,14.2 22.4,6.8 22.4,5.3 22.1,5 20.7,5 20.4,5.3 20.4,13.2
MA_SENS on Bottom Layer "MA_SENS_L02_P007" (solid, pour order 7): 24.55,54.5 24.6,54.55 24.6,71.098 27.202,73.7 56.5,73.7 68.9,86.1 96.4,86.1 96.4,91.7 63.9,91.7 52.8,80.6 23.2,80.6 16.45,74.05 16.45,54.5
MB_SENS on Bottom Layer "MB_SENS_L02_P009" (solid, remove dead copper, pour order 9): 45.5,66.1 82.1,66.1 82.1,58.1 37.1,58.1 36.3,58.1 36.3,66.1
MB_SENS on Bottom Layer "MB_SENS_L02_P006" (solid, remove dead copper, pour order 6): 36.3,54.5 44.4,54.5 44.4,63 36.3,63
MA_SENS on Bottom Layer "MA_SENS_L02_P005" (solid, remove dead copper, pour order 5): 16.45,54.5 24.55,54.5 24.55,63 16.45,63

## Keep-outs
Keep-Out Layer:
  the board outline again, w1

## Silkscreen, mask and mechanical layers (free items; w line width, h text height)
Top Overlay:
  text "A_CUR" at 85.081,93.097 h1.07 r270
  text "B_CUR" at 87.481,93.097 h1.07 r270
  text "IN-" at 76.803,91.903 h1.07
  text "3V3" at 80.703,91.703 h1.07
  text "5V" at 81.103,89.803 h1.07
  text "IN+" at 80.903,88.003 h1.07
  text "16->24VINT+" at 1.203,87.103 h1.07
  text "=>" at 5.103,86.397 h1.07 r270
  text "+" at 12.103,81.125 h1.07
  text "_" at 12.281,76.203 h1.07 r90
  text "MA" at 93.603,74.303 h1.07
  text "MC" at 93.603,52.003 h1.07
  text "BLDC DRIVER V0.1" at 95.946,26.254 h1.52 r90
  text "DESIGN BY: DAO HUU TUAN" at 98.946,14.854 h1.52 r90
  text "GND" at 29.403,0.403 h1.07
  text "HA" at 59.599,0.403 h1.07
  text "LA" at 62.139,0.403 h1.07
  text "HB" at 64.679,0.403 h1.07
  text "LB" at 67.219,0.403 h1.07
  text "HC" at 69.759,0.403 h1.07
  text "LC" at 72.299,0.403 h1.07
  text "12VOUT" at 34.303,0.303 h1.07

## Dimensions
3,97 to 97,97 on dimension
3,3 to 3,97 on dimension
0,97 to 100,97 on dimension
3,0 to 3,100 on dimension